# Altium PCB Main_cct..PcbDoc
Units mm, origin at the board's own origin, x right, y up, seen from the top; angles counter-clockwise.
Board outline 160.02 x 99.06 mm, 2 copper layers (Top Layer, Bottom Layer); 45 components, 26 nets, 107 pads, 2 vias.
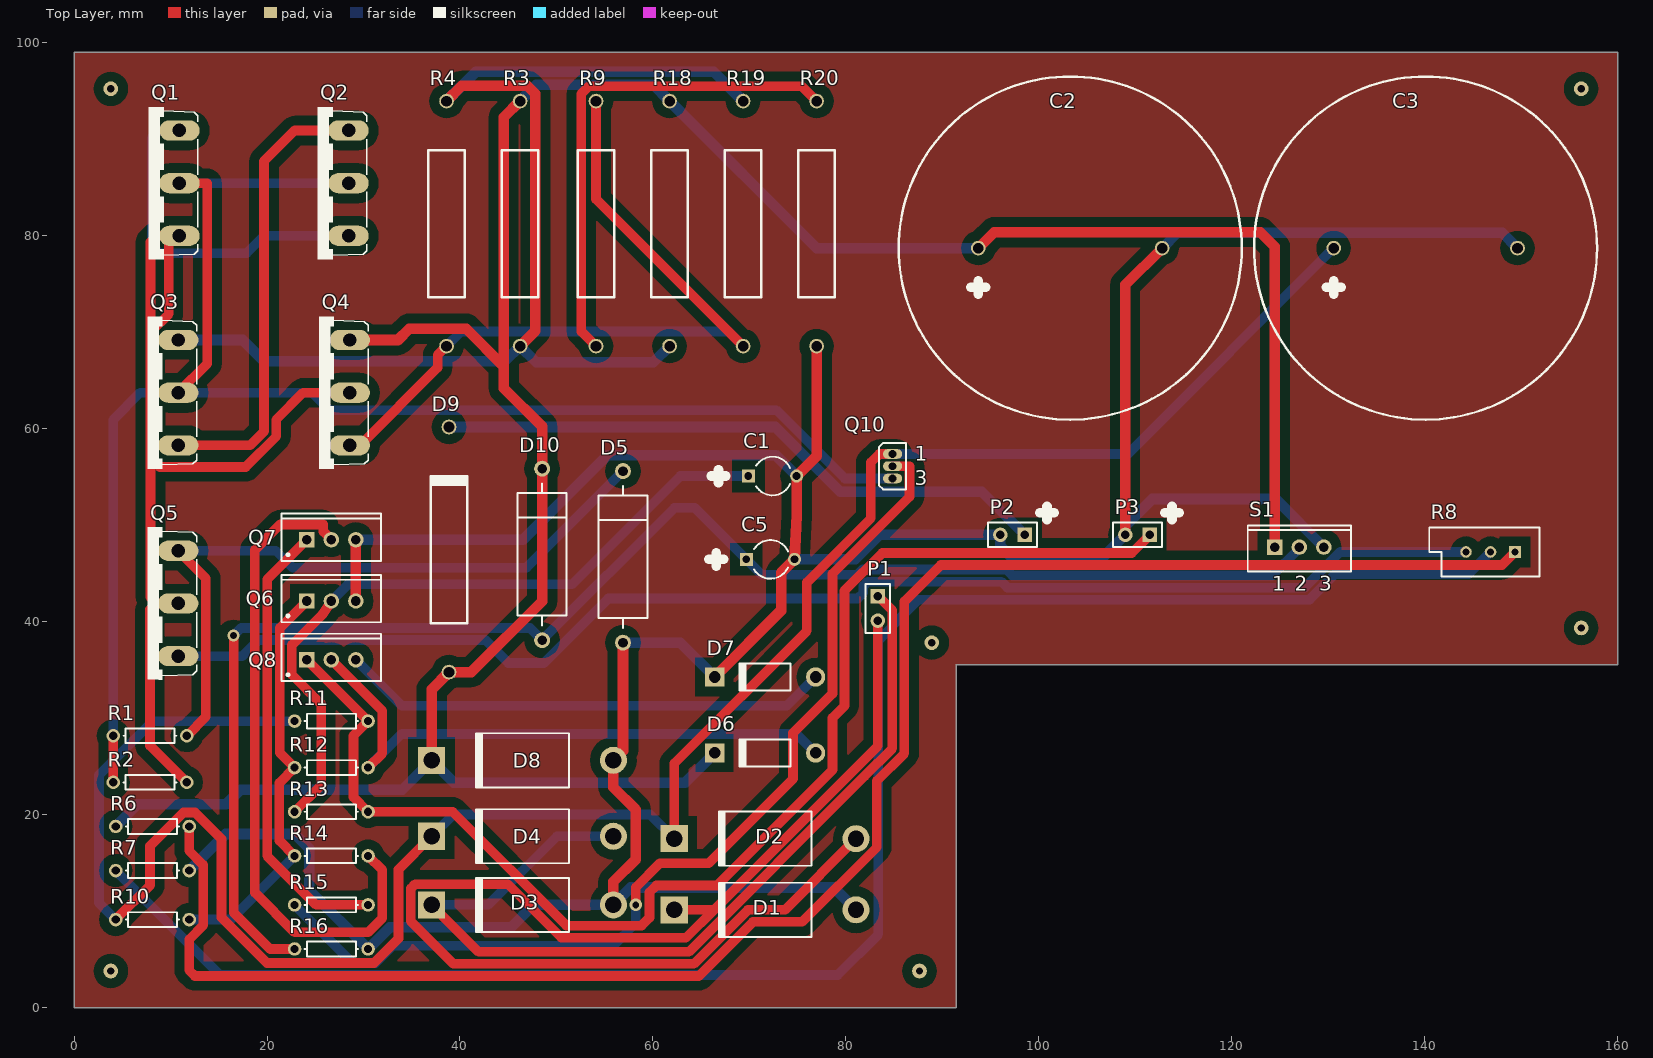
[diagram p0: Top Layer view]
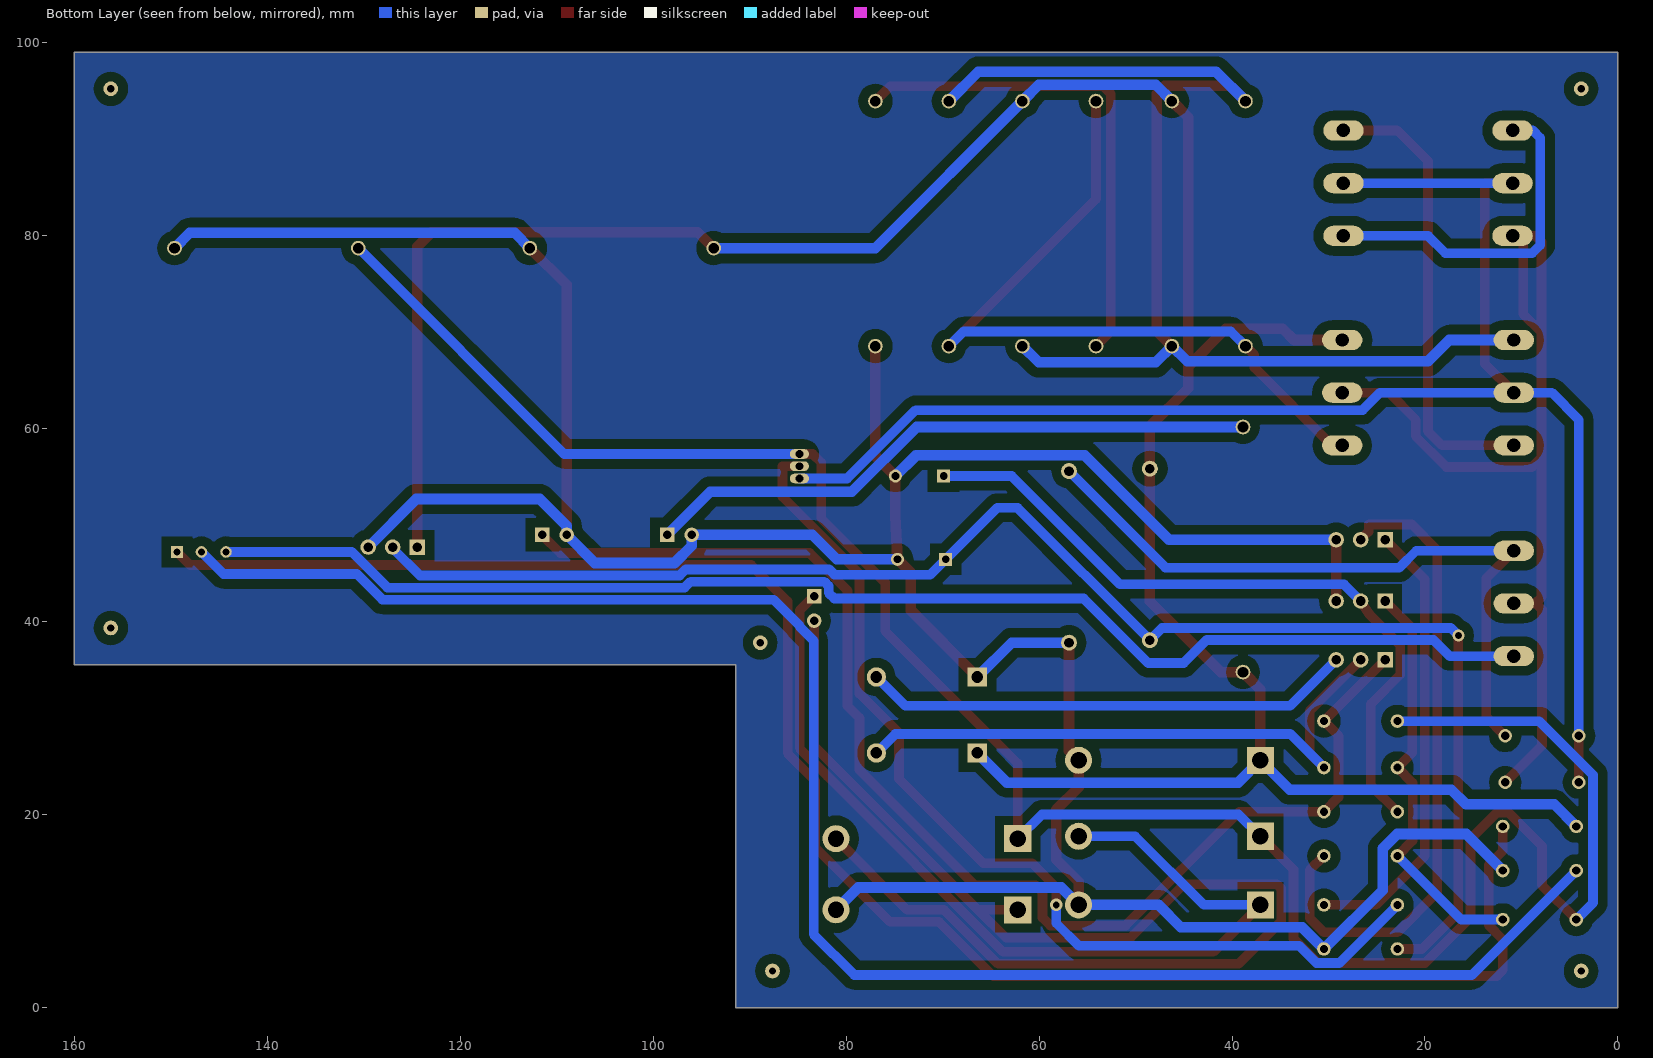
[diagram p1: Bottom Layer view, seen from below]

## Layer stack, top to bottom
Top Solder: solder mask 0.0102, Solder Resist, Dk 3.5
Top Layer: signal copper 0.0356
Dielectric 1: dielectric 0.32, FR-4, Dk 4.8
Bottom Layer: signal copper 0.0356
Bottom Solder: solder mask 0.0102, Solder Resist, Dk 3.5

## Board outline
0,0 0,99.06 160.02,99.06 160.02,35.56 91.44,35.56 91.44,0

## Design rules (kind name [scope] priority, off if disabled: settings)
Clearance [All] p1: gap=0.25 ignorepadtopadclearanceinfootprint=TRUE except(1: Arc-Poly Track-Poly SMDPad-Poly THPad-Poly Via-Poly Fill-Poly Poly-Poly)
DiffPairsRouting [All] p1: maxlimit=0.254 minlimit=0.254 mostfreqgap=0.254 toplayer_minwidth=0.381 toplayer_maxwidth=0.381 toplayer_prefwidth=0.381 bottomlayer_minwidth=0.381 bottomlayer_maxwidth=0.381 bottomlayer_prefwidth=0.381 substack1={F6785795-449B-4C8E-9574-95ECD2DA44BB} toplayer_{f6785795-449b-4c8e-9574-95ecd2da44bb}_minwidth=0.381 toplayer_{f6785795-449b-4c8e-9574-95ecd2da44bb}_maxwidth=0.381 toplayer_{f6785795-449b-4c8e-9574-95ecd2da44bb}_prefwidth=0.381 bottomlayer_{f6785795-449b-4c8e-9574-95ecd2da44bb}_minwidth=0.381 bottomlayer_{f6785795-449b-4c8e-9574-95ecd2da44bb}_maxwidth=0.381 bottomlayer_{f6785795-449b-4c8e-9574-95ecd2da44bb}_prefwidth=0.381 maxuncoupledlength=12.7
PlaneClearance [All] p1: clearance=5
PlaneConnect [All] p1: planeconnectstyle=Relief reliefexpansion=0.508 reliefentries=2 reliefconductorwidth=0.254 reliefairgap=0.254
PolygonConnect [All] p1: connectstyle=Relief reliefconductorwidth=0.254 reliefentries=2 polygonreliefangle="45 Angle" airgapwidth=5
RoutingVias [All] p1: holewidth=0.711 width=1.27 viastyle="Through Hole" minholewidth=0.711 minwidth=1.27 maxholewidth=0.711 maxwidth=1.27
SolderMaskExpansion [All] p1: expansion=0.102 istentingtop=FALSE
Width Width_Pwr [InNetClass('H_Pwr')] p1: maxlimit=1.15 minlimit=1.05 preferedwidth=1.1 substack1={F6785795-449B-4C8E-9574-95ECD2DA44BB} toplayer_{f6785795-449b-4c8e-9574-95ecd2da44bb}_minwidth=1 toplayer_{f6785795-449b-4c8e-9574-95ecd2da44bb}_maxwidth=1.2 bottomlayer_{f6785795-449b-4c8e-9574-95ecd2da44bb}_minwidth=1 bottomlayer_{f6785795-449b-4c8e-9574-95ecd2da44bb}_maxwidth=1.2
Width [All] p2: maxlimit=1.05 minlimit=0.95 preferedwidth=1 substack1={F6785795-449B-4C8E-9574-95ECD2DA44BB} toplayer_{f6785795-449b-4c8e-9574-95ecd2da44bb}_minwidth=0.8 toplayer_{f6785795-449b-4c8e-9574-95ecd2da44bb}_maxwidth=1 toplayer_{f6785795-449b-4c8e-9574-95ecd2da44bb}_prefwidth=0.9 bottomlayer_{f6785795-449b-4c8e-9574-95ecd2da44bb}_minwidth=0.8 bottomlayer_{f6785795-449b-4c8e-9574-95ecd2da44bb}_maxwidth=1 bottomlayer_{f6785795-449b-4c8e-9574-95ecd2da44bb}_prefwidth=0.9
27 further rules are at their usual default settings.

## Classes and differential pairs
net class H_Pwr: GND NetC2_1 NetC5_1 NetD9_2 NetQ3_E NetQ4_B NetQ5_B NetR6_1 NetR7_2 NetR9_1

## Components (designator, comment, footprint, x,y, rotation, side; value= is the part's Value field where it differs from the comment)
C1 "" CAPR5-4X5 72.39,55.118 r0 top value=0.1uF
C2 "4.7mF" "capacitor D 35mm" 93.726,78.74 r0 top
C3 "4.7mF" "capacitor D 35mm" 130.556,78.74 r0 top
C5 "" CAPR5-4X5 72.176,46.482 r0 top value=0.047uF
D1 "Diode MBR1045" DO-201AD 71.628,10.16 r180 top
D2 "Diode MBR1045" DO-201AD 71.628,17.526 r180 top
D3 "Diode MBR1045" DO-201AD 46.482,10.668 r180 top
D4 "Diode MBR1045" DO-201AD 46.482,17.78 r180 top
D5 "6.2V" DIODE-0.7 56.896,46.736 r90 top
D6 "BAT85" DO-204AL 71.628,26.416 r180 top
D7 "1N5817G" DO-204AL 71.628,34.29 r180 top
D8 "1N4007G" DO-201AD 46.482,25.654 r180 top
D9 "10SQ050" "resistor 25mm" 38.862,34.798 r90 top
D10 "11V" DIODE-0.7 48.514,46.99 r90 top
P1 "Header 2" HDR1X2 83.312,42.672 r270 top
P2 "Header 2" HDR1X2 98.552,49.022 r180 top
P3 "Header 2" HDR1X2 111.506,49.022 r180 top
Q1 "TIP3055G" TOP3AV 7.747,85.471 r90 top
Q2 "TIP3055G" TOP3AV 25.273,85.471 r90 top
Q3 "TIP3055G" TOP3AV 7.62,63.754 r90 top
Q4 "TIP3055G" TOP3AV 25.4,63.754 r90 top
Q5 "TIP3055G" TOP3AV 7.62,41.91 r90 top
Q6 "BC547BG" TO-262-AA 26.67,42.164 r0 top
Q7 "BC547BG" TO-262-AA 26.67,48.514 r0 top
Q8 "NPN" TO-262-AA 26.67,36.068 r0 top
Q10 "TIP125G" E3 84.836,56.134 r0 top
R1 "" AXIAL-0.3 7.874,28.194 r180 top value=1K
R2 "" AXIAL-0.3 7.874,23.368 r180 top value=1K
R3 "0.56" "resistor 25mm" 46.228,68.58 r90 top
R4 "1K" "resistor 25mm" 38.608,68.58 r90 top
R6 "" AXIAL-0.3 8.128,18.796 r180 top value=0.5K
R7 "" AXIAL-0.3 8.128,14.224 r180 top value=2K
R8 "" VR5 146.812,47.244 r180 top value=2K
R9 "3.3K" "resistor 25mm" 54.102,68.58 r90 top
R10 "Res1" AXIAL-0.3 8.128,9.144 r180 top value=4.7K
R11 "" AXIAL-0.3 26.67,29.718 r180 top value=4.7K
R12 "" AXIAL-0.3 26.67,24.892 r180 top value=22K
R13 "" AXIAL-0.3 26.67,20.32 r180 top value=22K
R14 "" AXIAL-0.3 26.67,15.748 r180 top value=100K
R15 "" AXIAL-0.3 26.67,10.668 r180 top value=3.3K
R16 "" AXIAL-0.3 26.67,6.096 r180 top value=1K
R18 "1" "resistor 25mm" 61.722,68.58 r90 top
R19 "6.8K" "resistor 25mm" 69.342,68.58 r90 top
R20 "3.3K" "resistor 25mm" 76.962,68.58 r90 top
S1 "BT151" TO-220-AB 127,47.752 r0 top

## Footprints (in the part's own frame and the unit in brackets; to place one, negate y for a bottom-side part, rotate by r counter-clockwise, add the part's x,y. Pads: shape width x height; smd on the part's side, far side on the other; paste and mask are expansions set on the pad)
AXIAL-0.3 [mm] "Axial Device, Thru-Hole; 2 Leads; 0.3 in Pin Spacing"
  round 1.4 hole 0.85: 1(-3.81,0) 2(3.81,0)
  silkscreen extent -2.77,-0.76 2.77,0.76
"capacitor D 35mm" [mil]
  round 60 hole 43.31: 1(0,0) 2(750,0)
  silkscreen extent -325,-700 1075,700
CAPR5-4X5 [mm] "Capacitor; 2 Leads"
  rect 1.35x1.35 hole 0.8: 1(-2.5,0)
  round 1.35 hole 0.8: 2(2.5,0)
  silkscreen extent -1.69,-2 1.82,2
DIODE-0.7 [mm] "Diode, Thru-Hole; 2 Leads; 0.7 in Pin Spacing"
  round 1.65 hole 1: 1(-8.89,0) 2(8.89,0)
  silkscreen extent -7.37,-2.54 7.37,2.54
DO-201AD [mm] "Diode, Axial; Body 9.5 x 5.6 mm (LxDia. max), Lead Dia. 1.32 mm (max)"
  round 2.8 hole 1.7: 1(-9.42,0)
  rect 2.8x2.8 hole 1.7: 2(9.42,0)
  silkscreen extent -4.8,-2.8 4.9,2.8
DO-204AL [mm] "Diode, Axial; Body 5.2 x 2.7 mm (LxDia. max), Lead Dia. 0.86 mm (max)"
  round 2 hole 1.2: 1(-5.23,0)
  rect 2x2 hole 1.2: 2(5.23,0)
  silkscreen extent -2.65,-1.4 2.75,1.4
E3 [mm] "TO, Flat Index; 3 In-Line, Axial Leads; Body Dia. 4.6mm; Lead Dia. 0.5 mm (max)"
  oval 2x1 hole 0.8: 1(0,1.27) 2(0,0) 3(0,-1.27)
  silkscreen extent -1.41,-2.41 1.41,2.41
HDR1X2 [mm] "Connector; Header; 2 Position"
  rect 1.5x1.5 hole 0.9: 1(0,0)
  round 1.5 hole 0.9: 2(2.54,0)
  silkscreen extent -1.27,-1.27 3.81,1.27
"resistor 25mm" [mil]
  round 60 hole 43.31: 1(0,0) 2(1000,0)
  silkscreen extent 200,-75 800,75
TO-220-AB [mm] "TO, Thru-Hole, Vertical, Heatsink Mounted; 3 In-Line Leads; Pitch 2.54 mm"
  rect 1.6x1.6 hole 1: 1(-2.54,0)
  round 1.6 hole 1: 2(0,0) 3(2.54,0)
  silkscreen extent -5.35,-2.55 5.35,2.25
TO-262-AA [mm] "TO, Thru-Hole, Vertical, Heatsink Mounted; 3 In-Line Leads; Pitch 2.54 mm"
  rect 1.6x1.6 hole 1: 1(-2.54,0)
  round 1.6 hole 1: 2(0,0) 3(2.54,0)
  silkscreen extent -5.15,-2.2 5.15,2.7, body extent -5.2,-2.25 5.2,2.75, height 19.7
TOP3AV [mil]
  oval 82.5x165 hole 55: B(-215,-125) C(0,-125) E(215,-125)
  silkscreen extent -310,-200 310,0
VR5 [mm] "Thru-Hole; 3 Leads"
  rect 1.2x1.2 hole 0.7: 1(-2.54,0)
  round 1.2 hole 0.7: 2(0,0) 3(2.54,0)
  silkscreen extent -5.08,-2.54 6.35,2.54

## Part data
C1 C5: library part Cap2, "Capacitor", PackageDescription="Capacitor; 2 Leads", PackageReference=CAPR5-4X5, Published=23-Sep-2002, Publisher="Altium Limited"
C2 C3: library part Component_1, "diameter 35mm"
D1 D2 D3 D4 D8: library part "Diode 1N5408", "3 Amp Medium Power Silicon Rectifier Diode", ComponentLink1Description="Manufacturer Link", ComponentLink1URL=http://www.irf.com/, DatasheetVersion=Aug-1984, LatestRevisionDate=17-Jul-2002, LatestRevisionNote="Re-released for DXP Platform.", PackageDescription="Diode, Axial; Body 9.5 x 5.3 mm (LxDia. max), Lead Dia. 1.32 mm (max)", PackageReference=DO-201AD, Published=8-Jun-2000, Publisher="Altium Limited"
D5: library part "D Zener", "Zener Diode", LatestRevisionDate=17-Jul-2002, LatestRevisionNote="Re-released for DXP Platform.", PackageDescription="Diode, Thru-Hole; 2 Leads; 0.7 in Pin Spacing", PackageReference=DIODE-0.7, Published=8-Jun-2000, Publisher="Altium Limited"
D6 D7 D9: library part "Diode 11DQ03", "Schottky Rectifier", Code_JEDEC=DO-204-AL, ComponentLink1Description="Manufacturer Link", ComponentLink1URL=http://www.irf.com/, ComponentLink2Description=Datasheet, ComponentLink2URL=http://www.irf.com/product-info/datasheets/data/11dq03.pdf, DatasheetVersion=Dec-1997, LatestRevisionDate=17-Jul-2002, LatestRevisionNote="Re-released for DXP Platform.", PackageDescription="Diode, Axial; Body 5.2 x 2.7 mm (LxDia. max), Lead Dia. 0.86 mm (max)", PackageReference=DO-204AL, Published=8-Jun-2000, Publisher="Altium Limited"
D10: library part "D Zener", "1N4741A", LatestRevisionDate=17-Jul-2002, LatestRevisionNote="Re-released for DXP Platform.", PackageDescription="Diode, Thru-Hole; 2 Leads; 0.7 in Pin Spacing", PackageReference=DIODE-0.7, Published=8-Jun-2000, Publisher="Altium Limited"
P1 P2 P3: "Header, 2-Pin", LatestRevisionDate=17-Jul-2002, LatestRevisionNote="Re-released for DXP Platform.", Publisher="Altium Limited"
Q1 Q2 Q3 Q4 Q5: library part TIP3055, "Tranzistor bipolar _BJT_ NPN 60V 15A 90W Gura de trecere TO-247-3", Package="TO-247-3 Bourns", Availability=Unavailable, MF="ON Semiconductor", MP=TIP3055, Price=None, SnapEDA_Link=https://www.snapeda.com/parts/TIP3055/ON%20Semiconductor/view-part/2756238/?ref=snap
Q6 Q7: library part NPN, "NPN Bipolar Transistor", Code_JEDEC=TO-226-AA, LatestRevisionDate=17-Jul-2002, LatestRevisionNote="Re-released for DXP Platform.", PackageDescription="TO, Flat Index; 3 In-Line, Axial Leads; Body Dia. 4.8mm; Leads 0.55 x 0.51 mm (max)", PackageReference=TO-226-AA, Published=8-Jun-2000, Publisher="Altium Limited"
Q8: "NPN Bipolar Transistor", Code_JEDEC=TO-226-AA, LatestRevisionDate=17-Jul-2002, LatestRevisionNote="Re-released for DXP Platform.", PackageDescription="TO, Flat Index; 3 In-Line, Axial Leads; Body Dia. 4.8mm; Leads 0.55 x 0.51 mm (max)", PackageReference=TO-226-AA, Published=8-Jun-2000, Publisher="Altium Limited"
Q10: library part PNP1, "PNP Darlington Bipolar Transistor", ComponentLink1Description="Manufacturer Link", ComponentLink1URL=http://www.zetex.com/, DatasheetVersion=May-1994, LatestRevisionDate=17-Jul-2002, LatestRevisionNote="Re-released for DXP Platform.", PackageDescription="TO, Flat Index; 3 In-Line, Axial Leads; Body Dia. 4.6mm; Lead Dia. 0.5 mm (max)", PackageReference=E3, PackageVersion=1995/1996, Published=8-Jun-2000, Publisher="Altium Limited"
R1 R2 R6 R7 R11 R12 R13 R14 R15 R16: library part Res1, "Resistor", LatestRevisionDate=17-Jul-2002, LatestRevisionNote="Re-released for DXP Platform.", PackageDescription="Axial Device, Thru-Hole; 2 Leads; 0.3 in Pin Spacing", PackageReference=AXIAL-0.3, Published=8-Jun-2000, Publisher="Altium Limited"
R3 R4 R9 R18 R19 R20: library part Component_1, "25mm length"
R8: library part RPot, "Potentiometer", LatestRevisionDate=17-Jul-2002, LatestRevisionNote="Re-released for DXP Platform.", PackageDescription="Variable Resistor, Thru-Hole; 3 Leads", PackageReference=VR5, Published=8-Jun-2000, Publisher="Altium Limited", Set Position=0.5, Sim Note="Enter the Resistance value and the set point into parameter fields."
R10: "Resistor", LatestRevisionDate=17-Jul-2002, LatestRevisionNote="Re-released for DXP Platform.", PackageDescription="Axial Device, Thru-Hole; 2 Leads; 0.3 in Pin Spacing", PackageReference=AXIAL-0.3, Published=8-Jun-2000, Publisher="Altium Limited"
S1: library part SCR, "Silicon Controlled Rectifier", Code_JEDEC=TO-220-AB, LatestRevisionDate=17-Jul-2002, LatestRevisionNote="Re-released for DXP Platform.", PackageReference=TO-220-AB, Published=8-Jun-2000, Publisher="Altium Limited"

## Free pads (board coordinates)
  round 1.524 hole 0.762: 15(3.81,95.25) 16(3.81,3.81) 17(87.63,3.81) 18(156.21,39.37) 19(156.21,95.25) 20(88.9,37.846)

## Via types
v1: diameter 1.27, hole 0.711, Top Layer to Bottom Layer, 2 vias

## Nets (pads, with @x,y where several pads share a name; then routed paths per layer and width w, separated by ;. In a path a pad name is that pad's centre, name@x,y a point inside that pad or via, vN(x,y) a via of type N, cw(c..) or ccw(c..) an arc to the next point about the centre after c; other vN are vias at no path point)
GND: C1.2 C2.2 C3.2 C5.2 D1.1 D3.1 D5.1 D7.2 D8.1 P2.2 P3.2 Q6.3 Q7.3 R7.1 R16.1 R20.1 S1.3 | length 349.9
  Top Layer w1.1: Q6.3 Q7.3 ; D3.1 55.902,13.052 58.217,15.367 58.217,20.545 55.902,22.86 D8.1 56.896,26.648 D5.1 ; D7.2 73.279,41.171 73.279,45.085 C5.2 74.89,51.014 C1.2 76.962,57.19 R20.1 ; P3.2 108.966,74.93 C2.2
  Bottom Layer w1.1: R7.1 15.723,18.009 22.885,18.009 24.384,16.51 24.384,12.192 R16.1 32.741,8.357 45.314,8.357 47.625,10.668 D3.1 57.705,12.471 78.737,12.471 D1.1 ; Q7.3 46.533,48.514 55.27,57.252 72.756,57.252 C1.2 ; D5.1 62.842,37.846 D7.2 ; C5.2 80.955,46.482 83.495,49.022 P2.2 96.012,47.879 97.79,46.101 106.045,46.101 P3.2 108.966,49.936 111.76,52.73 124.562,52.73 S1.3 ; C2.2 114.351,80.315 148.031,80.315 C3.2
NetC1_1: C1.1 Q6.2 R13.2 | length 74.4
  Top Layer w1: R13.2 25.603,23.063 25.603,31.495 22.58,34.518 22.58,37.618 25.73,40.768 Q6.2
  Bottom Layer w1: Q6.2 28.397,43.891 51.613,43.891 62.84,55.118 C1.1
NetC2_1: C2.1 D6.2 D8.2 D9.1 D10.2 Q4.E R3.2 R6.2 R18.2 S1.1 | length 280.4
  Top Layer w1.1: Q4.E 33.579,69.215 34.747,70.383 40.64,70.383 44.552,66.472 ; D8.2 37.062,32.998 D9.1 41.173,34.798 48.514,42.139 D10.2 48.514,60.249 44.552,64.211 44.552,66.472 ; R3.2 44.552,92.304 44.552,66.472 ; C2.1 95.377,80.391 122.936,80.391 124.46,78.867 S1.1
  Bottom Layer w1.1: R6.2 6.604,21.082 15.748,21.082 17.272,22.606 34.014,22.606 D8.2 39.373,23.343 63.325,23.343 D6.2 ; R3.2 47.904,95.656 60.046,95.656 R18.2 76.962,78.74 C2.1
NetC5_1: C5.1 D10.1 R16.2 S1.2 | length 158.2
  Top Layer w1: v1(16.535,38.583) 16.535,9.881 20.32,6.096 R16.2
  Bottom Layer w1: v1(16.535,38.583) 17.317,39.364 47.25,39.364 D10.1 62.23,51.816 64.342,51.816 C5.1 71.265,44.893 81.204,44.893 81.734,45.422 96.631,45.422 97.252,44.801 124.17,44.801 127,47.631 S1.2
NetD1_2: D1.2 D2.1 P1.2 | length 133
  Top Layer w1: D1.2 66.314,10.16 ; D2.1 73.682,10.16 69.85,10.16 64.242,4.552 39.317,4.552 34.912,8.957 34.912,12.379 35.351,12.818 44.952,12.818 50.511,7.259 63.413,7.259 66.314,10.16 ; P1.2 83.312,27.158 66.314,10.16
NetD3_2: D3.2 D4.1 P1.1 | length 96.7
  Top Layer w1: D3.2 41.928,5.802 63.724,5.802 81.948,24.026 84.812,26.89 84.812,41.172 P1.1
  Bottom Layer w1: D3.2 42.926,10.668 50.038,17.78 D4.1
NetD5_2: D5.2 Q5.E R1.1 | length 72.2
  Top Layer w1: Q5.E 13.665,44.501 13.665,30.175 R1.1
  Bottom Layer w1: Q5.E 20.904,47.371 22.657,45.618 46.888,45.618 D5.2
NetD6_1: D6.1 Q8.2 R12.1 | length 62.6
  Top Layer w1: Q8.2 31.953,30.785 31.953,26.365 R12.1
  Bottom Layer w1: R12.1 33.96,28.372 74.902,28.372 D6.1
NetD7_1: D7.1 Q8.3 | length 50.8
  Bottom Layer w1: Q8.3 33.96,31.318 73.886,31.318 D7.1
NetD9_2: D9.2 P2.1 | length 64.3
  Bottom Layer w1.1: D9.2 72.695,60.198 79.4,53.492 94.082,53.492 P2.1
NetP3_1: P3.1 Q8.1 R11.1 R13.1 | length 134
  Top Layer w1: Q8.1 R11.1 28.971,28.209 28.971,21.829 R13.1 39.218,20.32 51.029,8.509 58.821,8.509 59.651,9.339 59.651,11.975 60.355,12.679 66.629,12.679 78.613,24.663 78.613,30.045 79.858,31.29 79.858,43.231 83.771,47.144 109.628,47.144 P3.1
NetQ1_B: Q1.B Q4.C Q5.C R2.1 | length 101.9
  Top Layer w1: Q1.B Q1.B@9.83,80.01 ; R2.1 7.874,27.178 7.874,41.275 8.534,41.935 ; Q4.C 23.749,63.754 20.955,60.96 20.955,59.233 17.78,56.058 8.89,56.058 7.925,57.023 ; 7.925,57.023 7.925,70.028 ; 7.925,57.023 7.925,42.545 8.534,41.935 ; 7.925,70.028 7.925,79.375 8.56,80.01 Q1.B@9.83,80.01 ; 7.925,70.028 9.83,71.933 Q1.B@9.83,80.01 ; 8.534,41.935 8.56,41.91 Q5.C 8.534,41.935
NetQ1_C: Q1.C Q2.C Q3.C Q10.3 R1.2 R2.2 | length 166.6
  Top Layer w1: R2.2 R1.2 ; Q3.C 13.792,66.751 13.792,85.471 Q1.C
  Bottom Layer w1: R1.2 4.064,60.96 6.858,63.754 Q3.C 24.663,63.754 26.467,61.951 72.796,61.951 79.883,54.864 Q10.3 ; Q1.C Q2.C
NetQ1_E: Q1.E Q2.B | length 35.8
  Bottom Layer w1: Q1.E 8.814,90.932 8.052,90.17 8.052,79.045 8.89,78.207 17.882,78.207 19.685,80.01 Q2.B
NetQ2_E: Q2.E Q3.B | length 47.6
  Top Layer w1: Q3.B 18.237,58.293 19.685,59.741 19.685,87.757 22.86,90.932 Q2.E
NetQ3_E: Q3.E R3.1 R4.2 R18.1 R19.2 | length 124.1
  Top Layer w1.1: R4.2 40.183,95.555 46.99,95.555 47.803,94.742 47.803,70.155 R3.1
  Bottom Layer w1.1: Q3.E 17.475,69.215 19.685,67.005 44.653,67.005 R3.1 47.904,66.904 60.046,66.904 R18.1 ; R4.2 41.656,97.028 66.294,97.028 R19.2
NetQ4_B: Q4.B R4.1 R9.2 R19.1 | length 78.8
  Top Layer w1: Q4.B 29.616,58.293 37.694,66.37 37.694,67.666 R4.1 ; R9.2 54.102,83.82 R19.1
  Bottom Layer w1: R4.1 40.132,70.104 67.818,70.104 R19.1
NetQ5_B: Q5.B R8.3 | length 140.9
  Bottom Layer w1: Q5.B 17.45,36.449 19.115,38.114 42.633,38.114 45.009,35.738 48.692,35.738 55.372,42.418 81.226,42.418 81.812,43.004 81.812,43.733 82.251,44.172 96.113,44.172 96.734,43.551 127.531,43.551 131.224,47.244 R8.3
NetQ6_1: Q6.1 R10.1 R12.2 R14.2 | length 43.2
  Top Layer w1: R14.2 21.285,17.323 21.285,23.317 R12.2 21.33,26.422 21.33,39.364 Q6.1
  Bottom Layer w1: R10.1 16.256,9.144 R14.2
NetQ7_1: Q7.1 R15.1 | length 47
  Top Layer w1: Q7.1 20.015,44.399 20.015,15.748 25.095,10.668 R15.1
NetQ7_2: Q7.2 R14.1 | length 68.2
  Top Layer w1: Q7.2 25.832,49.352 25.832,50.089 21.361,50.089 18.745,47.473 18.745,11.938 22.86,7.823 30.48,7.823 31.953,9.296 31.953,14.275 R14.1
NetQ10_2: Q10.2 R15.2 | length 103.4
  Top Layer w1: v1(58.217,10.668) 58.217,12.471 60.731,14.986 65.786,14.986 74.524,23.724 74.524,28.478 78.608,32.563 78.608,44.989 86.589,52.969 86.589,56.134 Q10.2
  Bottom Layer w1: R15.2 28.882,4.646 31.24,4.646 33.02,6.426 55.88,6.426 58.217,8.763 v1(58.217,10.668)
NetR6_1: R6.1 R8.1 | length 185.2
  Top Layer w1: R6.1 11.938,16.275 13.388,14.825 13.388,8.543 11.938,7.093 11.938,3.888 12.524,3.302 64.76,3.302 70.368,8.91 75.473,8.91 83.198,16.635 83.198,23.508 86.062,26.372 86.062,42.12 89.836,45.894 148.002,45.894 R8.1
NetR7_2: R7.2 R8.2 | length 183
  Bottom Layer w1: R7.2 15.146,3.396 79.139,3.396 83.363,7.62 83.363,38.061 84.812,39.511 84.812,39.6 87.513,42.301 128.049,42.301 130.706,44.958 144.526,44.958 R8.2
NetR9_1: R9.1 R20.2 | length 52.1
  Top Layer w1: R9.1 52.578,70.104 52.578,94.742 53.34,95.504 75.438,95.504 R20.2
VCC: C3.1 D2.2 D4.2 Q10.1 R10.2 R11.2 | length 230.6
  Top Layer w1: R10.2 7.866,12.692 7.866,16.775 11.337,20.246 12.539,20.246 15.285,17.499 15.285,9.363 20.002,4.646 31.081,4.646 33.621,7.187 33.621,14.339 D4.2 ; D2.2 62.208,25.327 75.946,39.065 75.946,44.094 82.575,50.724 82.575,56.515 83.464,57.404 Q10.1
  Bottom Layer w1: R10.2 2.591,10.871 2.591,24.13 8.179,29.718 R11.2 ; D4.2 39.323,20.041 59.693,20.041 D2.2 ; Q10.1 109.22,57.404 C3.1

## Polygon pours and split planes (outlines as drawn)
no net on Bottom Layer "NONET_L02_P001" (solid, pour order 1): 0,99.06 0,0 91.44,0 91.44,35.56 160.02,35.56 160.02,99.06
no net on Top Layer "NONET_L01_P000" (solid, pour order 0): 0,99.06 0,0 91.44,0 91.44,35.56 160.02,35.56 160.02,99.06

## Silkscreen, mask and mechanical layers (free items; w line width, h text height)
Top Overlay:
  lines w0.254: 37.084,54.61 40.64,54.61 40.386,54.356 ; 40.64,54.356 40.64,54.864
  lines w0.5: 37.084,54.356 40.64,54.356 ; 37.084,54.864 40.64,54.864
  lines w1: 65.786,46.482 66.548,46.482 ; 66.04,55.118 66.802,55.118 ; 66.548,45.79 66.548,46.482 ; 66.548,47.136 66.548,46.482 ; 66.802,54.426 66.802,55.118 ; 66.802,55.772 66.802,55.118 ; 67.31,46.482 66.548,46.482 ; 67.564,55.118 66.802,55.118 ; 92.964,74.676 93.726,74.676 ; 93.726,73.984 93.726,74.676 ; 93.726,75.33 93.726,74.676 ; 94.488,74.676 93.726,74.676 ; 100.076,51.308 100.838,51.308 ; 100.838,50.616 100.838,51.308 ; 100.838,51.962 100.838,51.308 ; 101.6,51.308 100.838,51.308 ; 113.03,51.308 113.792,51.308 ; 113.792,50.616 113.792,51.308 ; 113.792,51.962 113.792,51.308 ; 114.554,51.308 113.792,51.308 ; 129.794,74.676 130.556,74.676 ; 130.556,73.984 130.556,74.676 ; 130.556,75.33 130.556,74.676 ; 131.318,74.676 130.556,74.676

## Dimensions
0,0 to 91.44,0 on Top Overlay
160.02,99.06 to 160.02,35.56 on Top Overlay
0,99.06 to 160.02,99.06 on Top Overlay
0,99.06 to 0,0 on Top Overlay

## Text inside footprints (layer, text, board x,y; h text height)
Q10: Top Overlay "1" at 87.111,56.689 h1.5; Top Overlay "3" at 87.111,54.171 h1.5
S1: Top Overlay "1" at 124.21,43.227 h1.5; Top Overlay "2" at 126.5,43.227 h1.5; Top Overlay "3" at 129.04,43.227 h1.5